# EAGLE board ble121lr_dongle_v10_rot90 (EAGLE 6.5.0)
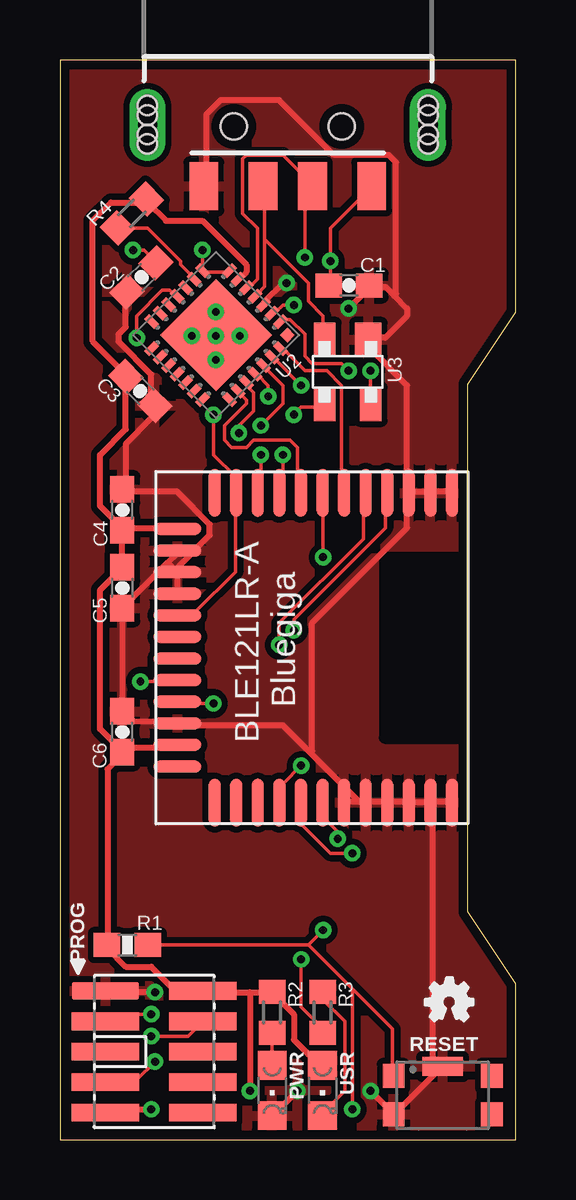
[diagram p0: board, top side]
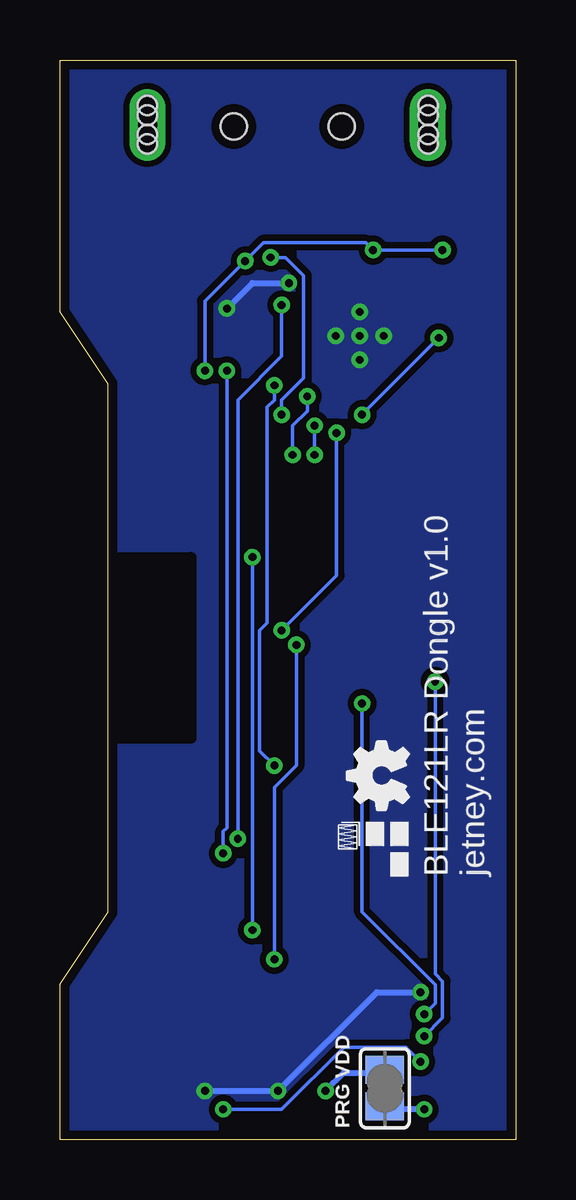
[diagram p1: board, bottom side, seen from below]

Size 19 x 45 mm. Coordinates in mm from the lower left corner, seen from the top.
Outline: 0,45 0,0 19,0 19,6.5 17,9.5 17,31.5 19,34.5 19,45 0,45
Copper layers (1*16): Top 0.0356mm / dielectric 1.5011mm / Bottom 0.0356mm
Design rules "default": minimum track width 6mil, minimum drill 13mil, track to track 6mil, track to pad 6mil, pad to pad 6mil, via to via 6mil, smd to smd 6mil, copper to edge 15mil, drill to drill 6mil, minimum pad ring 7mil, minimum via ring 7mil, stop-mask expansion 4mil, vias tented up to drill 13mil, thermal gap 10mil
Net classes: 0 default: width 0.152 mm, drill 0.33 mm, clearance 0.152 mm; 1 power: width 0.254 mm, drill 0.33 mm, clearance 0.152 mm

## Footprints (pad centres in the part's own frame; a part is rotated, then mirrored left to right if it is on the bottom)
0603-CAP = smd 1.1 x 1: 1 -0.85,0; 2 0.85,0
USB-A-SMT-MALE = smd 1.2 x 2: D+1 1.027,-3.67; D-1 -1.027,-3.67; GND1 3.5,-3.67; VBUS1 -3.5,-3.67 | drill 0.8 pad 1.5 long: P$1 5.85,-1.1; P$3 -5.85,-1.1 | hole 1.1: 2.25,-1.17; -2.25,-1.17 | hole 0.8: -5.85,-1.5; -5.85,-1.9; -5.85,-0.7; -5.85,-0.3; 5.85,-1.5; 5.85,-1.9; 5.85,-0.7; 5.85,-0.3
FTSH-105-DV = smd 0.74 x 2.8: 1 -2.54,-2.03; 2 -2.54,2.03; 3 -1.27,-2.03; 4 -1.27,2.03; 5 0,-2.03; 6 0,2.03; 7 1.27,-2.03; 8 1.27,2.03; 9 2.54,-2.03; 10 2.54,2.03
CHIPLED_0805 = smd 1.2 x 1.2: A 0,-1.05; C 0,1.05
0603-RES = smd 1.1 x 1: 1 -0.85,0; 2 0.85,0
R0603 = smd 1 x 1.1: 1 -0.85,0; 2 0.85,0
101-IG = smd 0.9 x 1: 1 -2.05,0.8; 2 -2.05,-0.8; 3 2.05,0.8; 4 2.05,-0.8 | smd 1.7 x 0.8: GND 0,1.2
SJ = smd 1.168 x 1.6: 1 -0.762,0; 2 0.762,0
BLE121LR-A = smd 0.5 x 2: AVDD -4.95,-5.6; DCDC -0.45,-5.6; DVDD 4.05,-5.6; GND@4 -4.05,-5.6; GND@5 -3.15,-5.6; GND@6 -2.25,-5.6; GND@7 3.15,-5.6; P1_6 -1.35,-5.6; P2_0 0.45,-5.6; P2_1 1.35,-5.6; P2_2 2.25,-5.6; SCL 4.95,-5.6 | smd 2 x 0.5: GND -6.45,5.85; GND@2 -6.45,4.95; GND@3 -6.45,4.05; GND@8 6.45,1.35; GND@9 6.45,2.25; GND@10 6.45,3.15; GND@11 6.45,4.05; GND@12 6.45,4.95; GND@13 6.45,5.85; NC 6.45,-3.15; P0_0 -6.45,1.35; P0_1 -6.45,2.25; P0_2 -6.45,3.15; P0_3 -6.45,-0.45; P0_4 -6.45,-1.35; P0_5 -6.45,-2.25; P0_6 -6.45,-3.15; P0_7 -6.45,-4.05; P1_2 6.45,0.45; P1_3 6.45,-0.45; P1_4 6.45,-1.35; P1_5 6.45,-2.25; RESET -6.45,0.45; SDA 6.45,-4.05
MLP28 = smd 0.6 x 0.3: 1 -2.3,1.5; 2 -2.3,1; 3 -2.3,0.5; 4 -2.3,0; 5 -2.3,-0.5; 6 -2.3,-1; 7 -2.3,-1.5; 15 2.3,-1.5; 16 2.3,-1; 17 2.3,-0.5; 18 2.3,0; 19 2.3,0.5; 20 2.3,1; 21 2.3,1.5 | smd 0.3 x 0.6: 8 -1.5,-2.3; 9 -1,-2.3; 10 -0.5,-2.3; 11 0,-2.3; 12 0.5,-2.3; 13 1,-2.3; 14 1.5,-2.3; 22 1.5,2.3; 23 1,2.3; 24 0.5,2.3; 25 0,2.3; 26 -0.5,2.3; 27 -1,2.3; 28 -1.5,2.3 | smd 3.3 x 3.3: EXP 0,0 | smd 0.435 x 0.435: M -2.103,2.103
SOT143 = smd 1.4 x 1.1: 1 -1.35,0.86 | smd 1.4 x 0.9: 2 -1.35,-0.96; 3 1.35,-0.96; 4 1.35,0.96

## Placement (x,y rotation side)
C1  1uF  [0603-CAP]  12.05,35.6 0 top
C2  0.1uF  [0603-CAP]  3.4,35.94 225 top
C3  0.1uF  [0603-CAP]  3.35,31.2 315 top
C4  4.7uF  [0603-CAP]  2.6,26.25 90 top
C5  1uF  [0603-CAP]  2.6,23 270 top
C6  1uF  [0603-CAP]  2.6,17 90 top
JP1  USBA-SMD-MALE  [USB-A-SMT-MALE]  9.5,43.4 0 top
LOGO1  OSHW_LOGO_FILLX0100-NT  [OSHW_FILLX100_NOTEXT]  4.46,13.76 90 bottom
LOGO2  OSHW_LOGO_FILLX0070-NT  [OSHW_FILLX70_NOTEXT]  15.24,4.96 0 top
PROG  CONN_5-2-FTSH-V  [FTSH-105-DV]  3.93,3.66 270 top
PWR  GREEN  [CHIPLED_0805]  8.85,2.05 180 top
R1  10K  [0603-RES]  2.81,8.11 180 top
R2  470  [R0603]  8.85,5.3 270 top
R3  470  [R0603]  10.95,5.3 90 top
R4  4.7k  [R0603]  3,38.6 45 top
S1  RESET  [101-IG]  15.96,1.85 0 top
SJ1  PRG VDD  [SJ]  5.45,2.14 90 bottom
U1  [BLE121LR-A]  10.5,20.5 270 top
U2  CP2102  [MLP28]  6.51,33.53 225 top
U3  SP0503BAHTG  [SOT143]  12,32 270 top
U$2  JETNEY-LOGO-12  [JETNEY-LOGO-12]  4.46,10.96 90 bottom
USR  BLUE  [CHIPLED_0805]  10.95,2.05 180 top

## Library data of the parts
C1-C6 R1 = SparkFun
JP1 = SparkFun-Connectors
LOGO1 LOGO2 = oshw-logo
PROG = pel_misc
PWR USR = led
R2-R4 = resistor
S1 U$2 = sf-keyglove
SJ1 = jumper
U1 = sf-bluegiga; ANTENNA: On-module ceramic chip antenna
U2 = silabs; MF: FARNELL; MPN: CP2102-GM; OC_FARNELL: 9282130; OC_NEWARK: 30K5635
U3 = littlefuse

## Nets
3.3V [power]: C3.1 C4.1 C5.1 C6.1 PROG.2 R1.2 R2.1 R4.2 SJ1.2 U1.AVDD U1.DVDD U2.6 USR.A
D+: JP1.D-1 U2.4 U3.2
D-: JP1.D+1 U2.5 U3.3
DCDC: U1.DCDC
GND [power]: C1.2 C2.2 C3.2 C4.2 C5.2 C6.2 JP1.VBUS1 PROG.1 PWR.C S1.2 S1.GND U1.GND U1.GND@2 U1.GND@3 U1.GND@4 U1.GND@5 U1.GND@6 U1.GND@7 U1.GND@8 U1.GND@9 U1.GND@10 U1.GND@11 U1.GND@12 U1.GND@13 U2.3 U3.1
N$1: PWR.A R2.2
N$2 [power]: U2.M
N$4: R3.2 USR.C
N$5 [power]: U2.EXP
N$6: R4.1 U2.9
NSUSPEND: U1.P0_6 U1.P1_6 U2.11
P0_0: U1.P0_0 U2.28
P0_1: R3.1 U1.P0_1
P0_2: U1.P0_2 U2.24
P0_3: U1.P0_3 U2.23
P0_4: U1.P0_4 U2.25
P0_5: U1.P0_5 U2.26
P0_7: U1.P0_7
P1_2: U1.P1_2 U2.2
P1_3: U1.P1_3 U2.1
P1_4: U1.P1_4 U2.27
P1_5: U1.P1_5
P2_0: U1.P2_0
P2_1: PROG.4 U1.P2_1
P2_2: PROG.3 U1.P2_2
PRG_VDD [power]: PROG.9 SJ1.1
RESET: PROG.7 R1.1 S1.1 U1.RESET
SCL: U1.SCL
SDA: U1.SDA
VBUS: C1.1 C2.1 JP1.GND1 U2.7 U2.8 U3.4

## Tracks (layer width: path | path; a pad name or v marks a point on that pad's centre or on a via)
3.3V  (via drill 0.33)
  Top 0.254: U2.6 7.47,35.86 7.77,36.16 7.77,36.47 5.94,38.29 4.42,38.29 3.66,39.06 R4.2 3.5,39.06 2.13,39.06 1.37,38.29 1.37,33.27 2.74,31.89 C3.1 2.74,31.74 2.74,29.61 1.68,28.54 1.68,26.41 2.59,25.49 C4.1 | C4.1 2.59,25.34 2.59,23.97 C5.1 2.59,23.82 1.68,22.9 1.68,17.11 2.59,16.2 C6.1 | U1.AVDD 4.88,25.49 2.74,25.49 C4.1 | 7.92,6.14 6.1,6.14 PROG.2 5.94,6.29 4.72,6.29 3.81,7.21 2.74,7.21 1.98,7.97 R1.2 1.98,8.12 1.98,15.43 2.59,16.04 C6.1 | 7.92,6.14 8.84,6.14 | 8.84,6.14 9.75,5.22 9.75,4.16 10.36,3.55 10.52,3.55 10.82,3.24 USR.A | 8.84,6.14 R2.1 | 7.92,6.14 v7.92,2.02 | U1.DVDD 4.88,16.35 2.9,16.35 2.74,16.2 C6.1
  Bottom 0.254: v7.92,2.02 7.16,2.79 5.49,2.79 SJ1.2
D+
  Top 0.152: 8.53,37.53 8.53,39.67 JP1.D-1 | 8.53,37.53 8.53,35.55 8.23,35.25 U2.4 | 8.53,37.53 10.36,35.7 10.36,34.94 10.97,34.33 10.97,33.42 U3.2
D-  (via drill 0.33)
  Top 0.152: 10.21,40.12 10.52,39.82 JP1.D+1 10.21,40.12 | 10.21,40.12 9.3,41.04 7.77,41.04 7.62,40.88 7.62,38.6 8.23,37.99 8.23,35.86 7.92,35.55 U2.5 | v9.75,30.22 10.06,30.52 10.97,30.52 U3.3 | 10.21,40.12 v10.21,36.77
  Bottom 0.152: v9.75,30.22 9.75,30.83 8.84,31.74 8.84,36.01 9.6,36.77 v10.21,36.77
GND  (via drill 0.33)
  Top 0.254: 16.46,27.02 U1.GND 16.31,27.02 15.54,27.02 U1.GND@2 15.39,27.02 14.63,27.02 U1.GND@3 | U1.GND@3 14.48,27.02 14.48,31.44 12.95,32.96 12.95,33.27 U3.1 12.95,33.42 13.56,33.42 14.48,34.33 14.48,34.64 13.95,35.17 | 8.53,34.79 U2.3 8.53,34.94 9.3,35.7 v9.45,35.7 | 13.95,35.17 13.56,35.55 12.95,35.55 | C2.2 2.74,35.25 2.74,33.88 2.44,33.57 2.44,33.27 3.81,31.89 3.81,30.67 C3.2 3.81,30.52 3.81,30.07 2.74,29 2.74,27.17 C4.2 2.74,27.02 4.88,27.02 6.25,25.64 6.25,25.19 4.88,23.82 U1.GND@5 | U1.GND@7 4.88,17.42 3.07,17.42 2.74,17.72 C6.2 2.59,17.87 C5.2 2.74,22.29 4.5,24.05 | 4.88,17.26 U1.GND@7 | 4.88,22.75 U1.GND@6 4.88,22.9 4.88,23.51 U1.GND@5 | 4.5,24.05 4.88,24.43 U1.GND@4 4.88,24.58 | 4.5,24.05 4.88,23.66 U1.GND@5 | U1.GND@12 15.54,14.06 16.31,14.06 U1.GND@13 16.46,14.06 | 12.5,14.06 12.65,14.06 U1.GND@9 12.8,14.06 13.56,14.06 U1.GND@10 13.72,14.06 14.48,14.06 U1.GND@11 14.63,14.06 15.39,14.06 U1.GND@12 | 12.5,14.06 11.89,14.06 U1.GND@8 | v9.91,2.02 8.99,1.11 PWR.C | v12.95,2.02 13.87,1.11 S1.2 14.02,1.11 15.85,2.94 S1.GND 15.54,2.79 15.54,13.91 U1.GND@12 | v3.96,6.14 1.98,6.14 PROG.1 | 12.5,14.06 10.44,16.12 | 10.44,16.12 9.3,17.26 5.03,17.26 U1.GND@7 | U1.GND@3 14.48,26.86 14.48,25.49 10.52,21.53 10.52,16.2 10.44,16.12 | 12.95,35.55 v12.04,34.64 | 12.95,35.55 C1.2 | JP1.VBUS1 6.1,39.82 6.1,42.71 6.71,43.32 9.14,43.32 11.43,41.04 13.72,41.04 14.02,40.73 14.02,35.25 13.95,35.17
  Bottom 0.254: v12.95,2.02 v9.91,2.02 5.79,6.14 v3.96,6.14 | v9.45,35.7 10.97,35.7 v12.04,34.64
  other vias: 6.5,33.5 6.5,32.5 7.5,33.5 6.5,34.5 5.5,33.5
  pour Bottom (isolate 0.254): 0,45 0,0 19,0 19,45
  pour Top (isolate 0.254): 0,45 0,0 19,0 19,45
N$1
  Top 0.152: R2.2 8.84,4.31 8.84,3.24 PWR.A
N$4
  Top 0.152: R3.2 10.97,6.14 10.97,5.83 11.89,4.92 11.89,2.02 10.97,1.11 USR.C
N$6
  Top 0.152: U2.9 5.49,36.01 5.03,36.47 5.03,36.62 3.66,37.99 2.44,37.99 R4.1
NSUSPEND  (via drill 0.33)
  Top 0.152: v3.2,33.42 3.2,34.33 4.27,35.4 4.57,35.4 4.72,35.25 4.88,35.25 U2.11 | v6.4,30.22 6.4,28.54 7.32,27.63 7.32,27.02 U1.P0_6 7.32,26.86 7.32,23.66 5.64,21.99 5.03,21.99 U1.P1_6
  Bottom 0.152: v6.4,30.22 v3.2,33.42
P0_0
  Top 0.152: U2.28 9.3,32.96 10.21,32.05 11.12,32.05 11.73,31.44 11.73,27.02 U1.P0_0
P0_1  (via drill 0.33)
  Top 0.152: v10.06,7.51 10.06,5.53 10.82,4.77 10.82,4.46 R3.1 | v9.14,20.62 9.14,21.53 12.65,25.04 12.65,26.86 U1.P0_1
  Bottom 0.152: v10.06,7.51 10.06,14.67 9.14,15.59 v9.14,20.62
P0_2  (via drill 0.33)
  Top 0.152: v7.47,29.45 7.47,29.76 8.08,30.37 8.08,31.13 7.92,31.28 7.92,31.44 U2.24 | v9.75,21.23 9.75,21.68 13.56,25.49 13.56,26.86 U1.P0_2
  Bottom 0.152: v7.47,29.45 7.47,23.51 v9.75,21.23
P0_3
  Top 0.152: U2.23 7.47,31.13 7.77,30.83 7.77,30.67 6.86,29.76 6.86,29.15 7.16,28.85 7.77,28.85 8.08,29.15 9.6,29.15 9.91,28.85 9.91,27.02 U1.P0_3
P0_4  (via drill 0.33)
  Top 0.152: v8.69,30.98 8.69,31.44 8.23,31.89 U2.25 | v9.3,28.54 9.3,27.02 U1.P0_4
  Bottom 0.152: v8.69,30.98 8.69,30.37 9.3,29.76 v9.3,28.54
P0_5  (via drill 0.33)
  Top 0.152: v8.38,29.76 9.3,30.67 9.3,31.44 8.53,32.2 U2.26 | v8.38,28.54 8.38,27.02 U1.P0_5
  Bottom 0.152: v8.38,28.54 v8.38,29.76
P1_2  (via drill 0.33)
  Top 0.152: v9.75,34.79 9.3,34.79 8.99,34.48 U2.2 | v11.58,12.54 11.58,12.84 10.97,13.45 10.97,13.91 U1.P1_2
  Bottom 0.152: v9.75,34.79 9.75,32.66 11.58,30.83 v11.58,12.54
P1_3  (via drill 0.33)
  Top 0.152: v12.04,32.05 11.73,32.35 10.52,32.35 10.21,32.66 10.21,33.57 9.6,34.18 9.3,34.18 U2.1 | v12.19,11.93 11.28,11.93 10.06,13.15 10.06,13.91 U1.P1_3
  Bottom 0.152: v12.04,32.05 12.04,13 12.19,12.84 v12.19,11.93
P1_4  (via drill 0.33)
  Top 0.152: v10.06,31.44 8.99,32.5 U2.27 | v10.06,15.59 9.3,14.82 9.3,14.06 U1.P1_4
  Bottom 0.152: v10.06,31.44 10.06,30.83 10.36,30.52 10.36,21.53 10.67,21.23 10.67,16.2 v10.06,15.59
P2_1  (via drill 0.33)
  Top 0.152: v3.35,19.09 4.88,19.09 U1.P2_1 | v3.81,4.31 5.33,4.31 5.94,4.92 PROG.4
  Bottom 0.152: v3.35,19.09 3.35,6.9 3.05,6.59 3.05,5.07 v3.81,4.31
P2_2  (via drill 0.33)
  Top 0.152: v6.4,18.18 5.03,18.18 U1.P2_2 | v3.81,5.22 2.13,5.22 1.98,5.07 PROG.3
  Bottom 0.152: v6.4,18.18 6.4,9.49 3.35,6.44 3.35,5.68 v3.81,5.22
PRG_VDD  (via drill 0.33)
  Top 0.254: v3.81,1.26 1.98,1.26 PROG.9
  Bottom 0.254: v3.81,1.26 5.33,1.26 SJ1.1
RESET  (via drill 0.33)
  Top 0.152: 10.36,8.12 12.19,6.29 | 12.19,6.29 13.87,4.61 13.87,2.79 S1.1 | 10.36,8.12 3.81,8.12 R1.1 | v10.97,24.27 10.97,26.86 U1.RESET | 10.36,8.12 v10.97,8.73 | v3.96,3.24 3.2,2.48 1.98,2.48 PROG.7 | 12.19,6.29 v12.19,1.26
  Bottom 0.152: v10.97,8.73 v10.97,24.27 | v3.96,3.24 4.57,3.85 7.16,3.85 9.75,1.26 v12.19,1.26
VBUS  (via drill 0.33)
  Top 0.152: U2.7 7.01,36.16 6.1,36.16 U2.8 5.94,36.31 v5.94,37.08 | C1.1 11.28,35.7 v11.28,36.62 11.28,37.99 12.95,39.67 JP1.GND1 | v3.05,37.08 3.5,37.08 3.96,36.62 C2.1 | v12.95,32.05 12.95,30.67 U3.4
  Bottom 0.152: v3.05,37.08 v5.94,37.08 6.25,37.38 10.52,37.38 v11.28,36.62 12.95,34.94 v12.95,32.05

## Text on the board
tPlace: BLE121LR-A | Bluegiga | RESET
bPlace: jetney.com | BLE121LR Dongle v1.0 | PRG VDD